# Altium PCB PCB1.PcbDoc
Units mil, origin at the board's own origin, x right, y up, seen from the top; angles counter-clockwise.
Board outline 1455 x 1625 mil, 2 copper layers (Top Layer, Bottom Layer); 37 components, 51 nets, 144 pads, 39 vias.
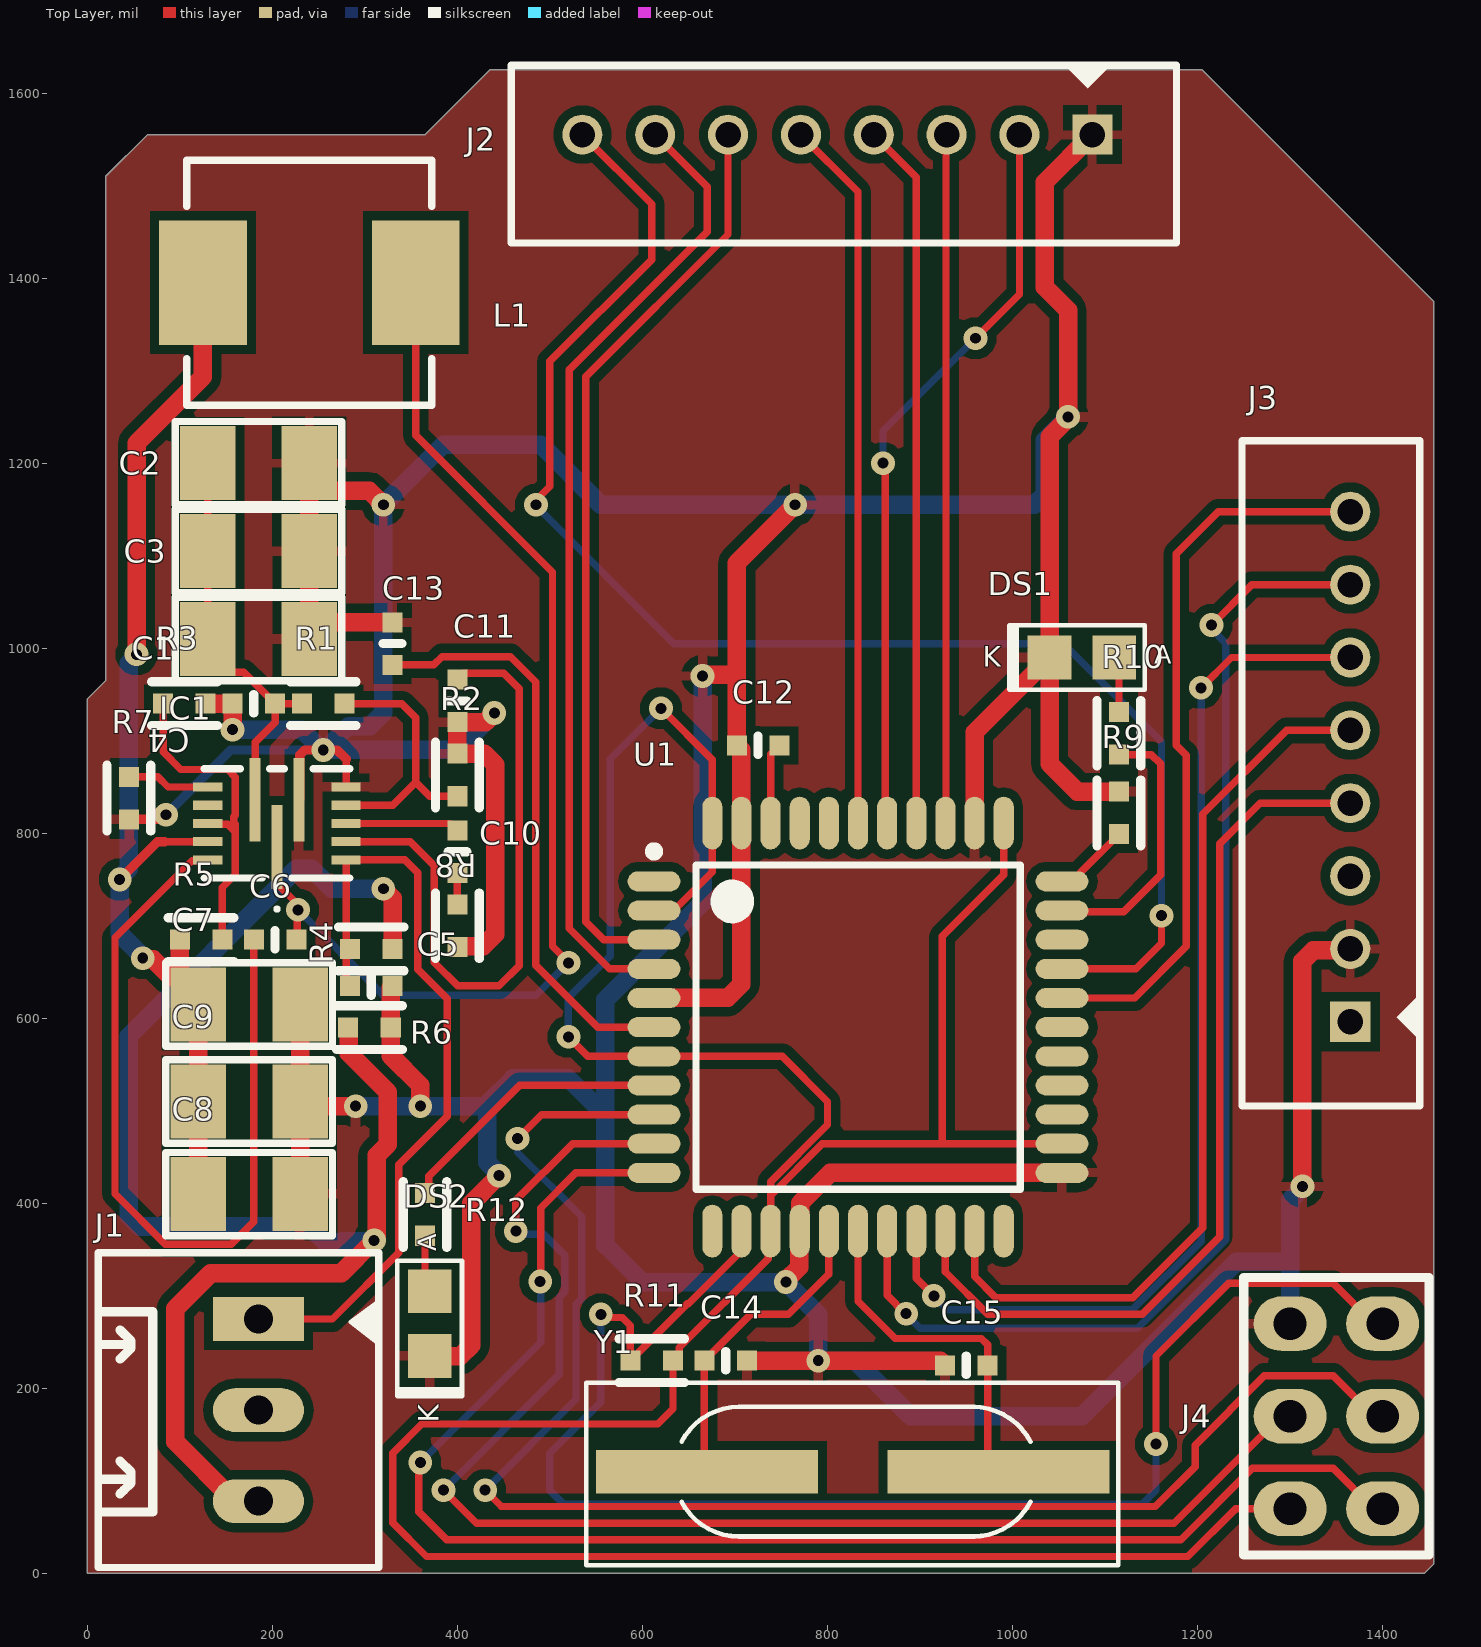
[diagram p0: Top Layer view]
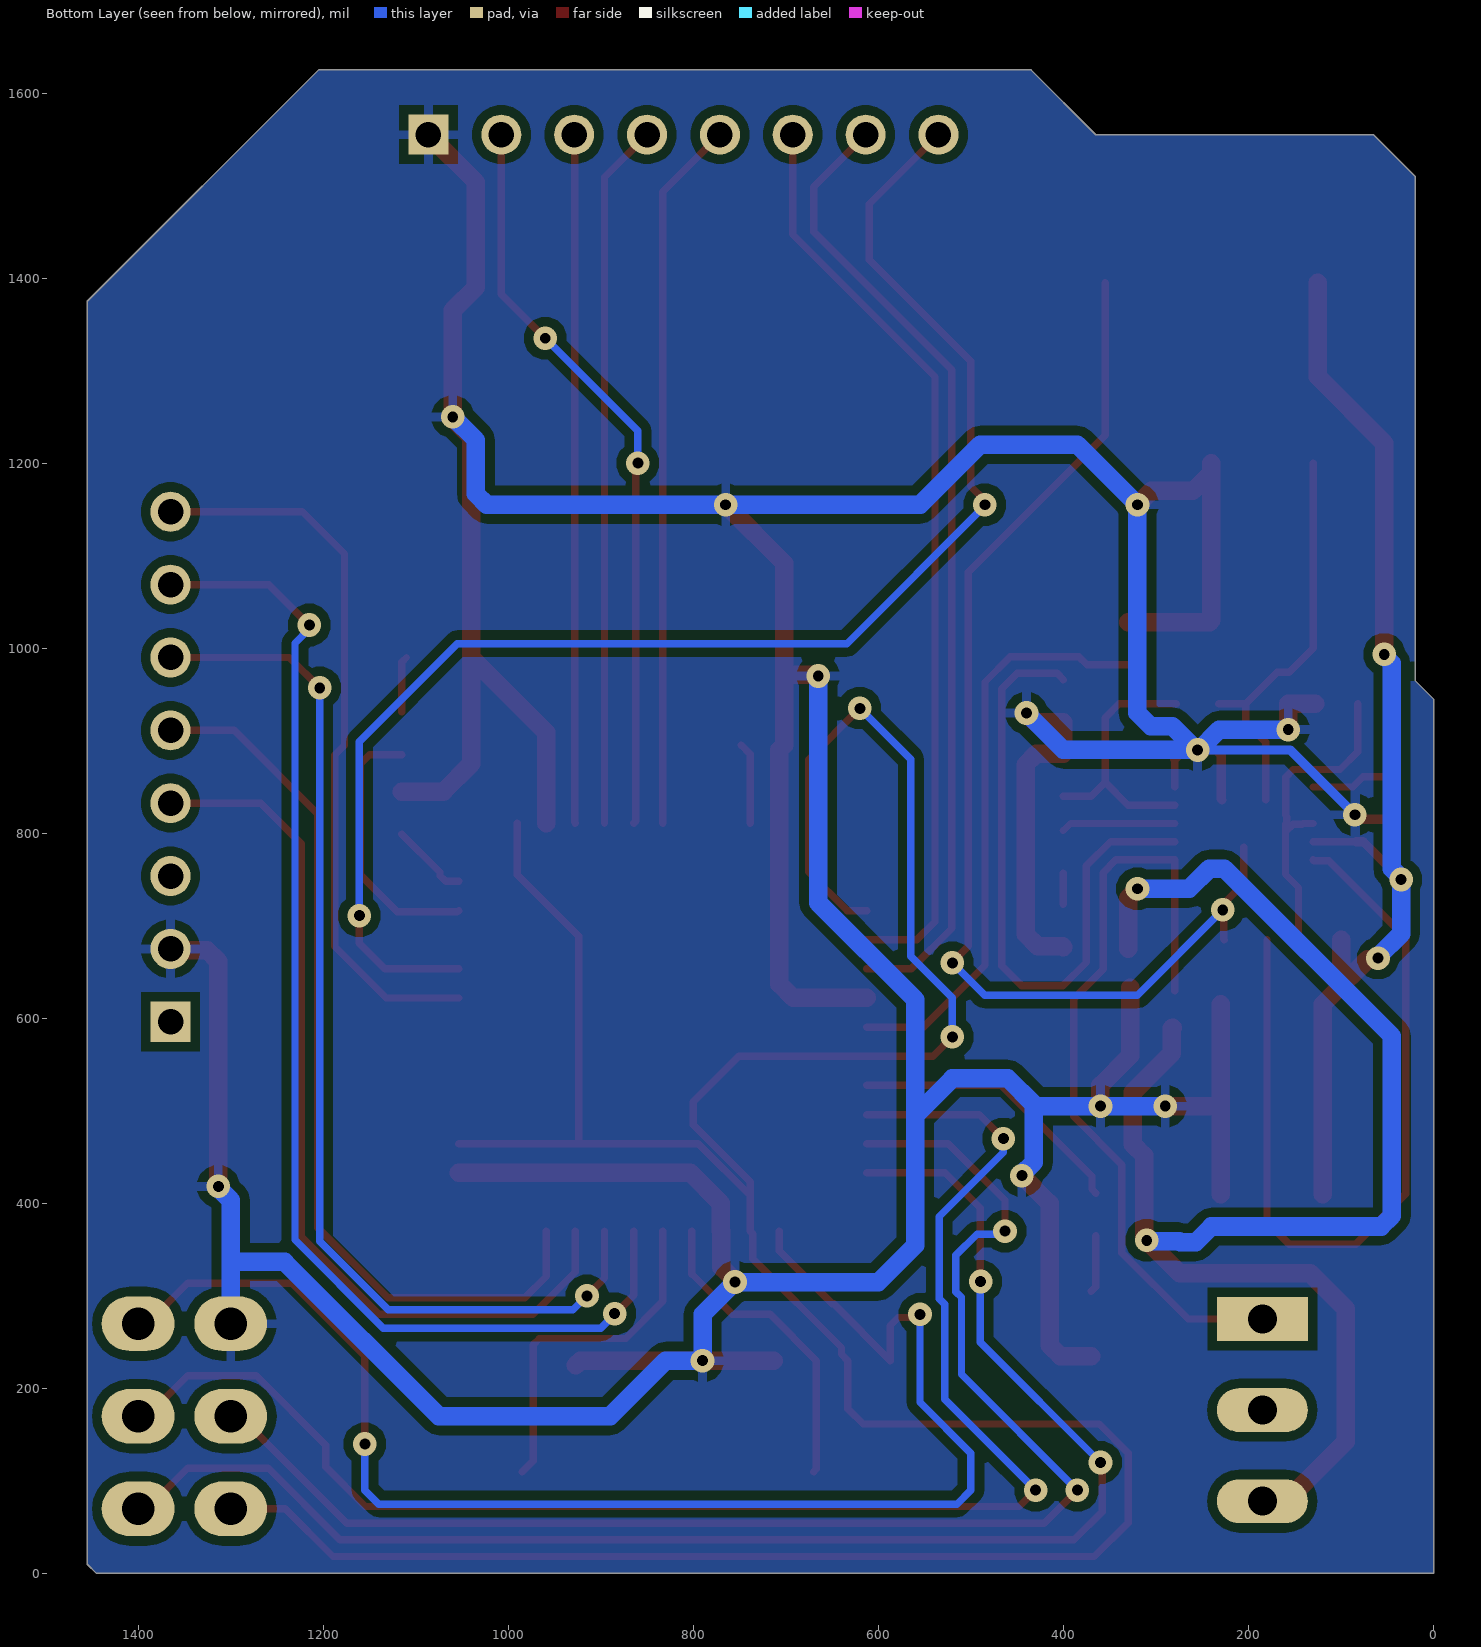
[diagram p1: Bottom Layer view, seen from below]
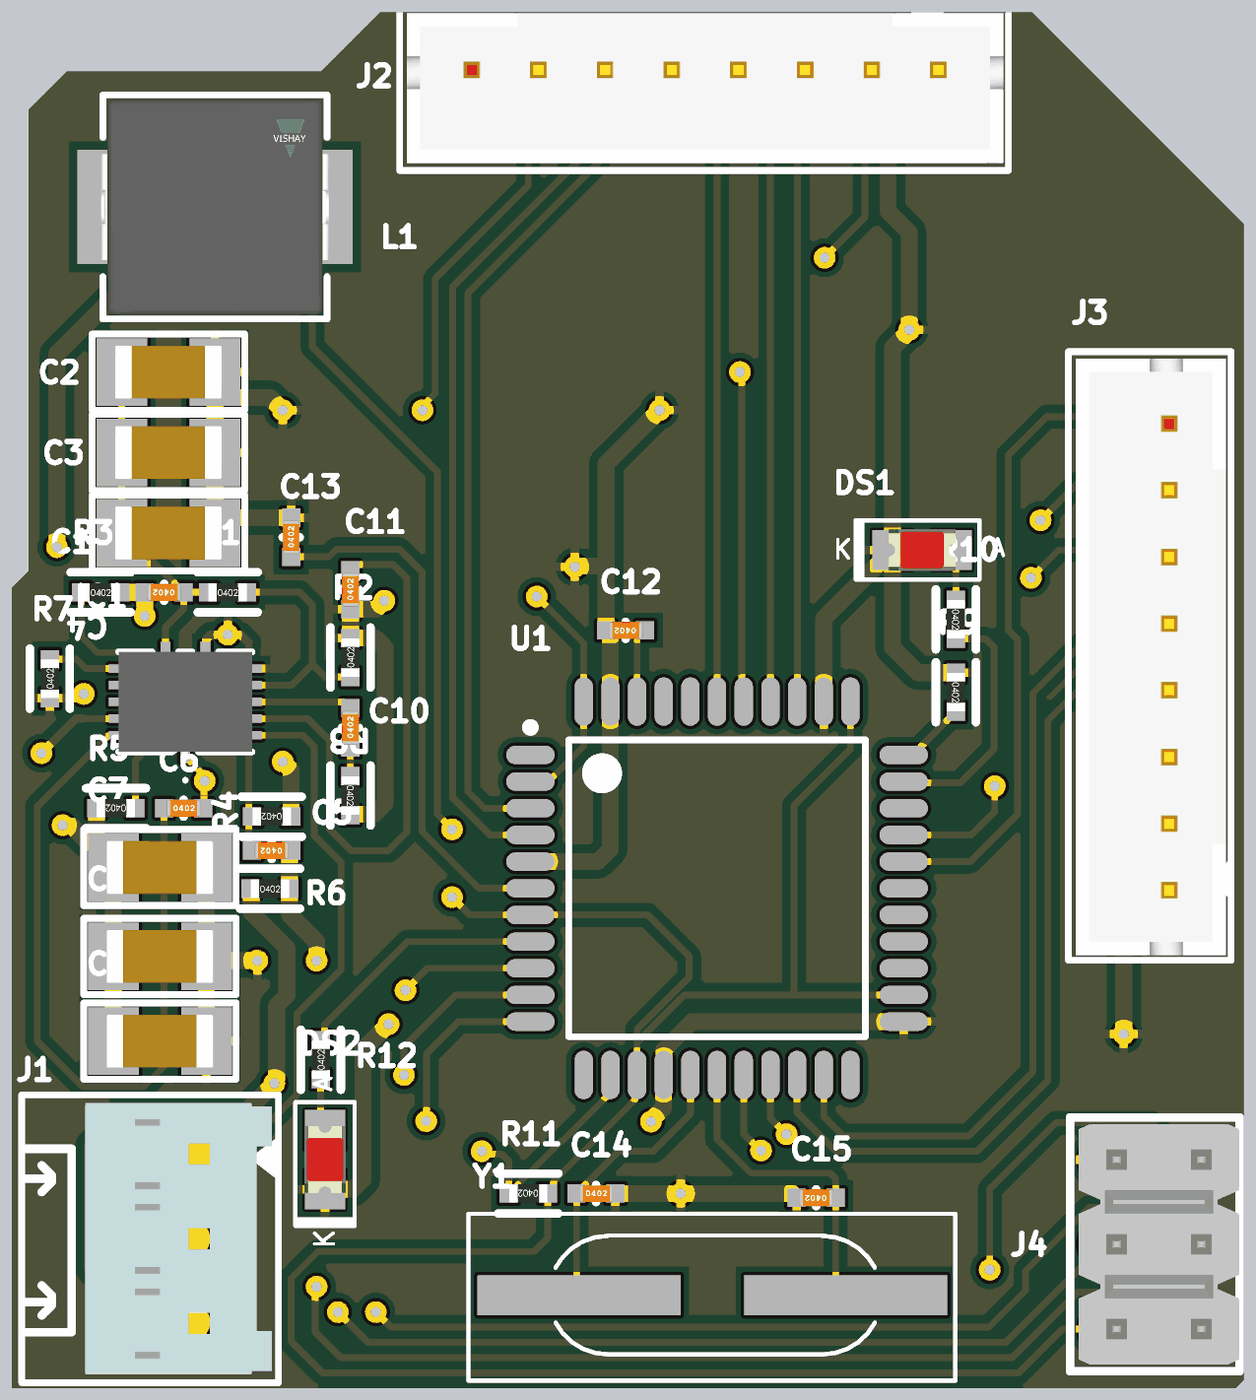
[diagram p2: 3D render of the assembled board from above, using the file's embedded part models]

## Layer stack, top to bottom
Top Solder: solder mask 0.4, Solder Resist, Dk 3.5
Top Layer: signal copper 1.4
Dielectric 1: dielectric 12.6, FR-4, Dk 4.8
Bottom Layer: signal copper 1.4
Bottom Solder: solder mask 0.4, Solder Resist, Dk 3.5

## Board outline
0,0 0,945 20,965 20,1510 65,1555 365,1555 435,1625 1205,1625 1455,1375 1455,10 1445,0

## Design rules (kind name [scope] priority, off if disabled: settings)
Clearance [All] p1: gap=10 ignorepadtopadclearanceinfootprint=TRUE except(0: Arc-Hole Track-Hole SMDPad-Hole THPad-Hole Via-Hole Fill-Hole Poly-Hole Region-Hole Text-Hole)
PolygonConnect [All] p1: connectstyle=Relief reliefconductorwidth=10 reliefentries=4 polygonreliefangle="90 Angle" airgapwidth=10
RoutingVias [All] p1: holewidth=9.84 width=23.62 viastyle="Through Hole" minholewidth=7.87 minwidth=19.68 maxholewidth=11.81 maxwidth=25.59
SolderMaskExpansion [All] p1: expansion=4 istentingtop=FALSE
Width [All] p1: maxlimit=100 minlimit=6 preferedwidth=10 minimp=50.000000 maximp=50.000000 favimp=50.000000
30 further rules are at their usual default settings.

## Classes and differential pairs
component class "BOOST Converter-EV3432-L-00A": C1 C2 C3 C4 C5 C6 C7 C8 C9 C10 C11 IC1 J1 L1 R1 R2 R3 R4 R5 R6 R7 R8
component class "BOOST CONVERTER-EV3432-L-00A - SHEET-2": C12 C13 C14 C15 DS1 DS2 J2 J3 J4 R9 R10 R11 R12 U1 Y1

## Components (designator, comment, footprint, x,y, rotation, side; value= is the part's Value field where it differs from the comment)
C1 "22µF" SMD-1206C 185,1010 r90 top
C2 "22µF" SMD-1206C 185,1200 r90 top
C3 "22µF" SMD-1206C 185,1105 r90 top
C4 "0.10µF" SMD-0402C 180,940 r90 top
C5 "4.7µF" SMD-0402C 307,635 r90 top
C6 "0.10µF" SMD-0402C 203,685 r270 top
C7 "22µF" SMD-1206C 175,615 r90 top
C8 "22µF" SMD-1206C 175,410 r90 top
C9 "22µF" SMD-1206C 175,510 r90 top
C10 "6800pF" SMD-0402C 400,780 r0 top
C11 "0.022µF" SMD-0402C 400,943 r0 top
C12 "0.10µF" SMD-0402C 725,895 r90 top
C13 "1µF" SMD-0402C 330,1005 r0 top
C14 "18pF" SMD-0402C 690,230 r270 top
C15 "18pF" SMD-0402C 950,225 r90 top
DS1 "LED BLUE" LED_0805 1075,990 r0 top
DS2 "RED LED" LED_0805 370,270 r90 top
IC1 "MP3432GL-Z" MP3432GLZ 205,810.59 r90 top
J1 "Terminal Block 2.5mm" CON3_100_TB_TH_ST 185,176.57 r0 top
J2 "B8B-PH-K-S(LF)(SN)" CON8_78_B8B-PH-K-S_TH_ST 1086.22,1555 r180 top
J3 "B8B-PH-K-S(LF)(SN)" CON8_78_B8B-PH-K-S_TH_ST 1365,596.26 r90 top
J4 "3X2 BergStrip" CON6_100_59D78_TH_ST_Duplicate 1400,70 r90 top
L1 "IHLP2525CZER1R5M51" FP-IHLP-2525CZ-FP_2_413x3-MFG 240,1395 r0 top
R1 "750k" SMD-0402-RES 255,940 r270 top
R2 "93.1k" SMD-0402-RES 400,863 r0 top
R3 "0.0" SMD-0402-RES 105,940 r270 top
R4 "130k" SMD-0402-RES 307,675 r90 top
R5 "30k" SMD-0402-RES 123,685 r90 top
R6 "20k" SMD-0402-RES 305,590 r270 top
R7 "27k" SMD-0402-RES 45,838 r0 top
R8 "6.8k" SMD-0402-RES 400,700 r180 top
R9 "10k" SMD-0402-RES 1115,822 r180 top
R10 "3k" SMD-0402-RES 1115,908 r180 top
R11 "10k" SMD-0402-RES 610,230 r90 top
R12 "3k" SMD-0402-RES 365,388 r0 top
U1 "ATmega32U4-AU" 44ML_L 832.99,590.47 r0 top
Y1 "ABLS7M-16.000MHZ-B-2-T" XTAL_314_240X47_SMD 984.96,110 r180 top

## Footprints (in the part's own frame and the unit in brackets; to place one, negate y for a bottom-side part, rotate by r counter-clockwise, add the part's x,y. Pads: shape width x height; smd on the part's side, far side on the other; paste and mask are expansions set on the pad)
44ML_L [mm] "Thin QFP, 44-Leads, Body 10x10mm, Pitch 0.8mm, IPC High Density"
  oval 1.45x0.55 smd: 1(-5.6,4) 2(-5.6,3.2) 3(-5.6,2.4) 4(-5.6,1.6) 5(-5.6,0.8) 6(-5.6,0) 7(-5.6,-0.8) 8(-5.6,-1.6) 9(-5.6,-2.4) 10(-5.6,-3.2) 11(-5.6,-4) 23(5.6,-4) 24(5.6,-3.2) 25(5.6,-2.4) 26(5.6,-1.6) 27(5.6,-0.8) 28(5.6,0) 29(5.6,0.8) 30(5.6,1.6) 31(5.6,2.4) 32(5.6,3.2) 33(5.6,4)
  oval 0.55x1.45 smd: 12(-4,-5.6) 13(-3.2,-5.6) 14(-2.4,-5.6) 15(-1.6,-5.6) 16(-0.8,-5.6) 17(0,-5.6) 18(0.8,-5.6) 19(1.6,-5.6) 20(2.4,-5.6) 21(3.2,-5.6) 22(4,-5.6) 34(4,5.6) 35(3.2,5.6) 36(2.4,5.6) 37(1.6,5.6) 38(0.8,5.6) 39(0,5.6) 40(-0.8,5.6) 41(-1.6,5.6) 42(-2.4,5.6) 43(-3.2,5.6) 44(-4,5.6)
  silkscreen extent -5.72,-4.45 4.45,4.95, body extent -5,-5 5,5, height 1.2
CON3_100_TB_TH_ST [mm]
  rect 2.5x1.2 hole 0.8: 1(0,2.5)
  oval 2.5x1.2 hole 0.8: 2(0,0) 3(0,-2.5)
  silkscreen extent -4.4,-4.32 3.3,4.32, body extent -2.5,-4.07 3.1,4.07, height 12.86
CON6_100_59D78_TH_ST_Duplicate [mm] "Berg strip"
  oval 1.5x2 hole 0.9: 1(0,0) 2(0,2.54) 3(2.54,0) 4(2.54,2.54) 5(5.08,0) 6(5.08,2.54)
  silkscreen extent -1.27,-1.27 6.35,3.81, body extent -1.07,-1.27 6.15,3.56, height 8.18
CON8_78_B8B-PH-K-S_TH_ST [mm] "Connector Header"
  rect 1.1x1.1 hole 0.7: 1(0,0)
  round 1.1 hole 0.7: 2(2,0) 3(4,0) 4(6,0) 5(8,0) 6(10,0) 7(12,0) 8(14,0)
  silkscreen extent -2.31,-1.91 15.95,2.97, body extent -2.16,-1.75 15.74,2.75, height 6.01
FP-IHLP-2525CZ-FP_2_413x3-MFG [mil]
  rect 95x135 smd paste+0 mask+0: 1(-115,0) 2(115,0)
  silkscreen extent -132,-132 132,132, body extent -166,-136 166,136, height 10
LED_0805 [mm] "LED"
  rect 1.2x1.2 smd mask+0.076: A(0.889,0) K(-0.889,0)
  silkscreen extent -1.99,-0.89 1.73,0.89, body extent -1.01,-0.62 1.01,0.63, height 1.1
MP3432GLZ [mm]
  rect 2.3x0.3 smd: 1(-0.65,0) 7(0.65,-0.6) 8(0.65,0.6)
  rect 0.25x0.8 smd: 2(-1,-1.9) 3(-0.5,-1.9) 4(0,-1.9) 5(0.5,-1.9) 6(1,-1.9) 9(1,1.9) 10(0.5,1.9) 11(0,1.9) 12(-0.5,1.9) 13(-1,1.9)
  silkscreen extent -2.4,-2 1.5,2, body extent -1.5,-2 1.5,2, height 1.1
SMD-0402-RES [mm]
  rect 0.55x0.55 smd: 1(0,0.584) 2(0,-0.584)
  silkscreen extent -0.6,-0.9 0.6,0.9, body extent -0.28,-0.57 0.27,0.58, height 0.41
SMD-0402C [mm]
  rect 0.55x0.55 smd: 1(0,0.584) 2(0,-0.584)
  silkscreen extent -0.25,0 0.25,0, body extent -0.25,-0.51 0.25,0.51, height 0.51
SMD-1206C [mil]
  rect 80x60 smd: 1(0,55) 2(0,-55)
  silkscreen extent -45,-90 45,90, body extent -31,-63 32,63, height 39
XTAL_314_240X47_SMD [mm] "CASE: TH"
  rect 6.096x1.2 smd: 1(0,0) 2(8,0)
  silkscreen extent -3.29,-2.44 11.32,2.57, body extent -2.99,-2.27 10.9,2.41, height 3.05

## Part data
C1 C2 C3 C7 C8 C9: library part GRT31CR61E226ME01L, "CAP CER 22UF 25V X5R 1206", Digi-Key Part Number=490-12451-1-ND, Manufacturer="Murata Electronics North America", Operating Temperature="-55°C ~ 85°C", Package / Case="1206 (3216 Metric)", Ratings=AEC-Q200, Temperature Coefficient=X5R, Tolerance=±20%, Voltage=25V, @ qty=0, Applications=Automotive, Datasheets=http://search.murata.co.jp/Ceramy/image/img/A01X/G101/ENG/GRT31CR61E226ME01-01.pdf, Factory Stock=0, Features=-, Height - Seated (Max)=-, Image=//media.digikey.com/Renders/Murata%20Renders/GR331BD72E473KW01L.jpg, Lead Spacing=-, Lead Style=-, Minimum Quantity=1, Mounting Type="Surface Mount, MLCC", Packaging="Cut Tape (CT)", Part Number=GRT31CR61E226ME01L, Part Status=Active, Quantity Available=4719, Series=GRT, Size / Dimension="0.126\" L x 0.063\" W (3.20mm x 1.60mm)", Thickness (Max)="0.071\" (1.80mm)", Unit Price (USD)=0.52
C4 C6: library part GRM155R61E104KA87D, "CAP CER 0.1UF 25V X5R 0402", Digi-Key Part Number=490-5920-1-ND, Manufacturer="Murata Electronics North America", Operating Temperature="-55°C ~ 85°C", Package / Case="0402 (1005 Metric)", Ratings=-, Temperature Coefficient=X5R, Tolerance=±10%, Voltage=25V, @ qty=0, Applications="General Purpose", Datasheets=http://www.murata.com/~/media/webrenewal/support/library/catalog/products/capacitor/mlcc/c02e.pdf, Factory Stock=0, Features=-, Height - Seated (Max)=-, Image=//media.digikey.com/Renders/Murata%20Renders/ZRB-SERIES-0402.jpg, Lead Spacing=-, Lead Style=-, Minimum Quantity=1, Mounting Type="Surface Mount, MLCC", Packaging="Cut Tape (CT)", Part Number=GRM155R61E104KA87D, Part Status=Active, Quantity Available=2653187, Series=GRM, Size / Dimension="0.039\" L x 0.020\" W (1.00mm x 0.50mm)", Thickness (Max)="0.022\" (0.55mm)", Unit Price (USD)=0.1
C5: library part GRM153R60J475ME15D, "CAP CER 4.7UF 6.3V X5R 0402", Digi-Key Part Number=490-13232-1-ND, Manufacturer="Murata Electronics North America", Operating Temperature="-55°C ~ 85°C", Package / Case="0402 (1005 Metric)", Ratings=-, Temperature Coefficient=X5R, Tolerance=±20%, Voltage=6.3V, @ qty=0, Applications="General Purpose", Datasheets=http://psearch.en.murata.com/capacitor/product/GRM153R60J475ME15%23.pdf, Factory Stock=0, Features="Derating Recommended", Height - Seated (Max)=-, Image=//media.digikey.com/Renders/Murata%20Renders/ZRB-SERIES-0402.jpg, Lead Spacing=-, Lead Style=-, Minimum Quantity=1, Mounting Type="Surface Mount, MLCC", Packaging="Cut Tape (CT)", Part Number=GRM153R60J475ME15D, Part Status=Active, Quantity Available=30412, Series=GRM, Size / Dimension="0.039\" L x 0.020\" W (1.00mm x 0.50mm)", Thickness (Max)="0.013\" (0.33mm)", Unit Price (USD)=0.27
C10: library part GCM155R71H682KA55D, "CAP CER 6800PF 50V X7R 0402", Digi-Key Part Number=490-11152-1-ND, Manufacturer="Murata Electronics North America", Operating Temperature="-55°C ~ 125°C", Package / Case="0402 (1005 Metric)", Ratings=AEC-Q200, Temperature Coefficient=X7R, Tolerance=±10%, Voltage=50V, @ qty=0, Applications=Automotive, Datasheets=http://www.murata.com/~/media/webrenewal/support/library/catalog/products/capacitor/mlcc/c03e.ashx, Factory Stock=0, Features=-, Height - Seated (Max)=-, Image=//media.digikey.com/Renders/Murata%20Renders/ZRB-SERIES-0402.jpg, Lead Spacing=-, Lead Style=-, Minimum Quantity=1, Mounting Type="Surface Mount, MLCC", Packaging="Cut Tape (CT)", Part Number=GCM155R71H682KA55D, Part Status=Active, Quantity Available=13886, Series=GCM, Size / Dimension="0.039\" L x 0.020\" W (1.00mm x 0.50mm)", Thickness (Max)="0.022\" (0.55mm)", Unit Price (USD)=0.1
C11: library part GRM155R61C223KA01D, "CAP CER 0.022UF 16V X5R 0402", Digi-Key Part Number=490-6312-1-ND, Manufacturer="Murata Electronics North America", Operating Temperature="-55°C ~ 85°C", Package / Case="0402 (1005 Metric)", Ratings=-, Temperature Coefficient=X5R, Tolerance=±10%, Voltage=16V, @ qty=0, Applications="General Purpose", Datasheets=http://www.murata.com/~/media/webrenewal/support/library/catalog/products/capacitor/mlcc/c02e.pdf, Factory Stock=0, Features=-, Height - Seated (Max)=-, Image=//media.digikey.com/Renders/Murata%20Renders/ZRB-SERIES-0402.jpg, Lead Spacing=-, Minimum Quantity=1, Mounting Type="Surface Mount, MLCC", Packaging="Cut Tape (CT)", Part Number=GRM155R61C223KA01D, Part Status=Active, Quantity Available=94602, Series=GRM, Size / Dimension="0.039\" L x 0.020\" W (1.00mm x 0.50mm)", Thickness (Max)="0.022\" (0.55mm)", Unit Price (USD)=0.1
C12: library part GCM155R71C104KA55D, "CAP CER 0.1UF 16V X7R 0402", Digi-Key Part Number=490-4759-1-ND, Manufacturer="Murata Electronics North America", Operating Temperature="-55°C ~ 125°C", Package / Case="0402 (1005 Metric)", Ratings=AEC-Q200, Temperature Coefficient=X7R, Tolerance=±10%, Voltage=16V, @ qty=0, Applications=Automotive, Datasheets=http://www.murata.com/~/media/webrenewal/support/library/catalog/products/capacitor/mlcc/c03e.ashx, Factory Stock=0, Features=-, Height - Seated (Max)=-, Image=//media.digikey.com/Renders/Murata%20Renders/ZRB-SERIES-0402.jpg, Lead Spacing=-, Lead Style=-, Minimum Quantity=1, Mounting Type="Surface Mount, MLCC", Packaging="Cut Tape (CT)", Part Number=GCM155R71C104KA55D, Part Status=Active, Quantity Available=734194, Series=GCM, Size / Dimension="0.039\" L x 0.020\" W (1.00mm x 0.50mm)", Thickness (Max)="0.022\" (0.55mm)", Unit Price (USD)=0.1
C13: library part GRM155C81C105KE11D, "CAP CER 1UF 16V X6S 0402", Digi-Key Part Number=490-12700-1-ND, Manufacturer="Murata Electronics North America", Operating Temperature="-55°C ~ 105°C", Package / Case="0402 (1005 Metric)", Ratings=-, Temperature Coefficient=X6S, Tolerance=±10%, Voltage=16V, @ qty=0, Applications="General Purpose", Datasheets=http://www.murata.com/~/media/webrenewal/support/library/catalog/products/capacitor/mlcc/c02e.pdf, Factory Stock=0, Features=-, Height - Seated (Max)=-, Image=//media.digikey.com/Renders/Murata%20Renders/ZRB-SERIES-0402.jpg, Lead Spacing=-, Lead Style=-, Minimum Quantity=1, Mounting Type="Surface Mount, MLCC", Packaging="Cut Tape (CT)", Part Number=GRM155C81C105KE11D, Part Status=Active, Quantity Available=37242, Series=GRM, Size / Dimension="0.039\" L x 0.020\" W (1.00mm x 0.50mm)", Thickness (Max)="0.024\" (0.60mm)", Unit Price (USD)=0.29
C14 C15: library part GRM1555C1E180JA01D, "CAP CER 18PF 25V NP0 0402", Digi-Key Part Number=490-6172-1-ND, Manufacturer="Murata Electronics North America", Operating Temperature="-55°C ~ 125°C", Package / Case="0402 (1005 Metric)", Ratings=-, Temperature Coefficient="C0G, NP0", Tolerance=±5%, Voltage=25V, @ qty=0, Applications="General Purpose", Datasheets=http://www.murata.com/~/media/webrenewal/support/library/catalog/products/capacitor/mlcc/c02e.pdf, Factory Stock=0, Features=-, Height - Seated (Max)=-, Image=//media.digikey.com/Renders/Murata%20Renders/ZRB-SERIES-0402.jpg, Lead Spacing=-, Lead Style=-, Minimum Quantity=1, Mounting Type="Surface Mount, MLCC", Packaging="Cut Tape (CT)", Part Number=GRM1555C1E180JA01D, Part Status=Active, Quantity Available=78161, Series=GRM, Size / Dimension="0.039\" L x 0.020\" W (1.00mm x 0.50mm)", Thickness (Max)="0.022\" (0.55mm)", Unit Price (USD)=0.1
DS1: library part LED_BLUE-3V3-20mA-0805, "Blue 470nm LED Indication - Discrete 3.3V 0805 (2012 Metric)", Alternate Part Number-1=NA, Case/Package=0805, Manufacturer="Vishay Lite-On", Manufacturer Part Number=LTST-C171TBKT, Supplier Part Number-1=LTST-C171TBKT, Supplier-1="SP ROAD"
DS2: library part LED_RED-2V-20mA-0805, "Red 631nm LED Indication - Discrete 2V 0805 (2012 Metric)", Alternate Part Number-1=NA, Case/Package=0805, Manufacturer="Vishay Lite-On", Manufacturer Part Number=LTST-C171KRKT, Supplier Part Number-1=LTST-C171KRKT, Supplier-1="SP ROAD"
IC1: "Integrated Circuit", Manufacturer_Name="Monolithic Power Systems (MPS)", Mouser Part Number=946-MP3432GL-Z, Height=1mm, Manufacturer_Part_Number=MP3432GL-Z, Mouser Price/Stock=https://www.mouser.co.uk/ProductDetail/Monolithic-Power-Systems-MPS/MP3432GL-Z?qs=rkhjVJ6%2F3EKdOTMiti3nIQ%3D%3D
J1: library part CON-TB_3X1-100-ST-TH, "3 Pins, 1 Row 2.54mm Pitch, straight Connector, male", Alternate Part Number-1=NA, Case/Package=TH-CON, Manufacturer="Phoenix Contact", Manufacturer Part Number=1725669, Supplier Part Number-1=1725669, Supplier-1="SP ROAD"
J2 J3: library part CON-PLG_8X1-78-ST-TH, "8 Pins, 1 Row 2mm Pitch, straight Connector, male", Alternate Part Number-1=NA, Case/Package=TH-CON, Manufacturer=JST, Mating Part Number=PHR-8, Supplier Part Number-1=C157975, Manufacturer Part Number=B8B-PH-K-S(LF)(SN), Supplier-1=LCSC
J4: library part CON-BS-PLG_3X2-100-ST-TH, "6 Pins, 2 Row 2.54mm Pitch, Straight bergstrip, Male", Alternate Part Number-1=NA, Case/Package=TH, Manufacturer=NA, Manufacturer Part Number=NA, Supplier Part Number-1=NA, Supplier-1="SP ROAD"
L1: library part CMP-02424-000221-1, "Commercial Inductors, High Temperature (155 °C) Series 1.5uH 10.6A 13.2mΩ 20%"
R1: library part ERJ-2RKF7503X, "RES SMD 750K OHM 1% 1/10W 0402", Digi-Key Part Number=P750KLCT-ND, Manufacturer="Panasonic Electronic Components", Operating Temperature="-55°C ~ 155°C", Package / Case="0402 (1005 Metric)", Power (Watts)="0.1W, 1/10W", Supplier Device Package=0402, Temperature Coefficient=±100ppm/°C, Tolerance=±1%, @ qty=1500, Composition="Thick Film", Datasheets=http://industrial.panasonic.com/www-cgi/jvcr13pz.cgi?E+PZ+3+AOA0002+ERJ2RKF7503X+7+WW, Factory Stock=0, Failure Rate=-, Features="Automotive AEC-Q200", Height - Seated (Max)="0.016\" (0.40mm)", Image=//media.digikey.com/Photos/Panasonic%20Photos/ERJ-PA2-Series.jpg, Minimum Quantity=1, Number of Terminations=2, Packaging="Cut Tape (CT)", Part Number=ERJ-2RKF7503X, Part Status=Active, Quantity Available=78807, Series=ERJ, Size / Dimension="0.039\" L x 0.020\" W (1.00mm x 0.50mm)", Unit Price (USD)=0.00496
R2: library part ERJ-2RKF9312X, "RES SMD 93.1K OHM 1% 1/10W 0402", Digi-Key Part Number=P93.1KLCT-ND, Manufacturer="Panasonic Electronic Components", Operating Temperature="-55°C ~ 155°C", Package / Case="0402 (1005 Metric)", Power (Watts)="0.1W, 1/10W", Supplier Device Package=0402, Temperature Coefficient=±100ppm/°C, Tolerance=±1%, @ qty=1500, Composition="Thick Film", Datasheets=http://industrial.panasonic.com/www-cgi/jvcr13pz.cgi?E+PZ+3+AOA0002+ERJ2RKF9312X+7+WW, Factory Stock=0, Failure Rate=-, Features="Automotive AEC-Q200", Height - Seated (Max)="0.016\" (0.40mm)", Image=//media.digikey.com/Photos/Panasonic%20Photos/ERJ-PA2-Series.jpg, Minimum Quantity=1, Number of Terminations=2, Packaging="Cut Tape (CT)", Part Number=ERJ-2RKF9312X, Part Status=Active, Quantity Available=130315, Series=ERJ, Size / Dimension="0.039\" L x 0.020\" W (1.00mm x 0.50mm)", Unit Price (USD)=0.00496
R3: library part ERJ-2GE0R00X, "RES SMD 0.0OHM JUMPER 1/10W 0402", Digi-Key Part Number=P0.0JCT-ND, Manufacturer="Panasonic Electronic Components", Operating Temperature="-55°C ~ 155°C", Package / Case="0402 (1005 Metric)", Power (Watts)="0.1W, 1/10W", Supplier Device Package=0402, Temperature Coefficient=-, Tolerance=Jumper, @ qty=1500, Composition="Thick Film", Datasheets=http://industrial.panasonic.com/www-cgi/jvcr13pz.cgi?E+PZ+3+AOA0001+ERJ2GE0R00X+7+WW, Factory Stock=0, Failure Rate=-, Features="Automotive AEC-Q200", Height - Seated (Max)="0.016\" (0.40mm)", Image=//media.digikey.com/Photos/Panasonic%20Photos/ERJ-PA2-Series.jpg, Minimum Quantity=1, Number of Terminations=2, Packaging="Cut Tape (CT)", Part Number=ERJ-2GE0R00X, Part Status=Active, Quantity Available=3152483, Series=ERJ, Size / Dimension="0.039\" L x 0.020\" W (1.00mm x 0.50mm)", Unit Price (USD)=0.00384
R4: library part ERJ-2RKF1303X, "RES SMD 130K OHM 1% 1/10W 0402", Digi-Key Part Number=P130KLCT-ND, Manufacturer="Panasonic Electronic Components", Operating Temperature="-55°C ~ 155°C", Package / Case="0402 (1005 Metric)", Power (Watts)="0.1W, 1/10W", Supplier Device Package=0402, Temperature Coefficient=±100ppm/°C, Tolerance=±1%, @ qty=1500, Composition="Thick Film", Datasheets=http://industrial.panasonic.com/www-cgi/jvcr13pz.cgi?E+PZ+3+AOA0002+ERJ2RKF1303X+7+WW, Factory Stock=0, Failure Rate=-, Features="Automotive AEC-Q200", Height - Seated (Max)="0.016\" (0.40mm)", Image=//media.digikey.com/Photos/Panasonic%20Photos/ERJ-PA2-Series.jpg, Minimum Quantity=1, Number of Terminations=2, Packaging="Cut Tape (CT)", Part Number=ERJ-2RKF1303X, Part Status=Active, Quantity Available=69838, Series=ERJ, Size / Dimension="0.039\" L x 0.020\" W (1.00mm x 0.50mm)", Unit Price (USD)=0.00496
R5: library part ERJ-2RKF3002X, "RES SMD 30K OHM 1% 1/10W 0402", Digi-Key Part Number=P30.0KLCT-ND, Manufacturer="Panasonic Electronic Components", Operating Temperature="-55°C ~ 155°C", Package / Case="0402 (1005 Metric)", Power (Watts)="0.1W, 1/10W", Supplier Device Package=0402, Temperature Coefficient=±100ppm/°C, Tolerance=±1%, @ qty=1500, Composition="Thick Film", Datasheets=http://industrial.panasonic.com/www-cgi/jvcr13pz.cgi?E+PZ+3+AOA0002+ERJ2RKF3002X+7+WW, Factory Stock=0, Failure Rate=-, Features="Automotive AEC-Q200", Height - Seated (Max)="0.016\" (0.40mm)", Image=//media.digikey.com/Photos/Panasonic%20Photos/ERJ-PA2-Series.jpg, Minimum Quantity=1, Number of Terminations=2, Packaging="Cut Tape (CT)", Part Number=ERJ-2RKF3002X, Part Status=Active, Quantity Available=144382, Series=ERJ, Size / Dimension="0.039\" L x 0.020\" W (1.00mm x 0.50mm)", Unit Price (USD)=0.00496
R6: library part ERJ-2RKF2002X, "RES SMD 20K OHM 1% 1/10W 0402", Digi-Key Part Number=P20.0KLCT-ND, Manufacturer="Panasonic Electronic Components", Operating Temperature="-55°C ~ 155°C", Package / Case="0402 (1005 Metric)", Power (Watts)="0.1W, 1/10W", Supplier Device Package=0402, Temperature Coefficient=±100ppm/°C, Tolerance=±1%, @ qty=1500, Composition="Thick Film", Datasheets=http://industrial.panasonic.com/www-cgi/jvcr13pz.cgi?E+PZ+3+AOA0002+ERJ2RKF2002X+7+WW, Factory Stock=0, Failure Rate=-, Features="Automotive AEC-Q200", Height - Seated (Max)="0.016\" (0.40mm)", Image=//media.digikey.com/Photos/Panasonic%20Photos/ERJ-PA2-Series.jpg, Minimum Quantity=1, Number of Terminations=2, Packaging="Cut Tape (CT)", Part Number=ERJ-2RKF2002X, Part Status=Active, Quantity Available=1690955, Series=ERJ, Size / Dimension="0.039\" L x 0.020\" W (1.00mm x 0.50mm)", Unit Price (USD)=0.00496
R7: library part ERJ-2RKF2702X, "RES SMD 27K OHM 1% 1/10W 0402", Digi-Key Part Number=P27.0KLCT-ND, Manufacturer="Panasonic Electronic Components", Operating Temperature="-55°C ~ 155°C", Package / Case="0402 (1005 Metric)", Power (Watts)="0.1W, 1/10W", Supplier Device Package=0402, Temperature Coefficient=±100ppm/°C, Tolerance=±1%, @ qty=1500, Composition="Thick Film", Datasheets=http://industrial.panasonic.com/www-cgi/jvcr13pz.cgi?E+PZ+3+AOA0002+ERJ2RKF2702X+7+WW, Factory Stock=0, Failure Rate=-, Features="Automotive AEC-Q200", Height - Seated (Max)="0.016\" (0.40mm)", Image=//media.digikey.com/Photos/Panasonic%20Photos/ERJ-PA2-Series.jpg, Minimum Quantity=1, Number of Terminations=2, Packaging="Cut Tape (CT)", Part Number=ERJ-2RKF2702X, Part Status=Active, Quantity Available=113507, Series=ERJ, Size / Dimension="0.039\" L x 0.020\" W (1.00mm x 0.50mm)", Unit Price (USD)=0.00496
R8: library part ERJ-2RKF6801X, "RES SMD 6.8K OHM 1% 1/10W 0402", Digi-Key Part Number=P6.80KLCT-ND, Manufacturer="Panasonic Electronic Components", Operating Temperature="-55°C ~ 155°C", Package / Case="0402 (1005 Metric)", Power (Watts)="0.1W, 1/10W", Supplier Device Package=0402, Temperature Coefficient=±100ppm/°C, Tolerance=±1%, @ qty=1500, Composition="Thick Film", Datasheets=http://industrial.panasonic.com/www-cgi/jvcr13pz.cgi?E+PZ+3+AOA0002+ERJ2RKF6801X+7+WW, Factory Stock=0, Failure Rate=-, Features="Automotive AEC-Q200", Height - Seated (Max)="0.016\" (0.40mm)", Image=//media.digikey.com/Photos/Panasonic%20Photos/ERJ-PA2-Series.jpg, Minimum Quantity=1, Number of Terminations=2, Packaging="Cut Tape (CT)", Part Number=ERJ-2RKF6801X, Part Status=Active, Quantity Available=52531, Series=ERJ, Size / Dimension="0.039\" L x 0.020\" W (1.00mm x 0.50mm)", Unit Price (USD)=0.00496
R9 R11: library part ERJ-2RKF1002X, "RES SMD 10K OHM 1% 1/10W 0402", Digi-Key Part Number=P10.0KLCT-ND, Manufacturer="Panasonic Electronic Components", Operating Temperature="-55°C ~ 155°C", Package / Case="0402 (1005 Metric)", Power (Watts)="0.1W, 1/10W", Supplier Device Package=0402, Temperature Coefficient=±100ppm/°C, Tolerance=±1%, @ qty=1500, Composition="Thick Film", Datasheets=http://industrial.panasonic.com/www-cgi/jvcr13pz.cgi?E+PZ+3+AOA0002+ERJ2RKF1002X+7+WW, Factory Stock=0, Failure Rate=-, Features="Automotive AEC-Q200", Height - Seated (Max)="0.016\" (0.40mm)", Image=//media.digikey.com/Photos/Panasonic%20Photos/ERJ-PA2-Series.jpg, Minimum Quantity=1, Number of Terminations=2, Packaging="Cut Tape (CT)", Part Number=ERJ-2RKF1002X, Part Status=Active, Quantity Available=9922786, Series=ERJ, Size / Dimension="0.039\" L x 0.020\" W (1.00mm x 0.50mm)", Unit Price (USD)=0.00496
R10 R12: library part ERJ-2RKF3001X, "RES SMD 3K OHM 1% 1/10W 0402", Digi-Key Part Number=P3.00KLCT-ND, Manufacturer="Panasonic Electronic Components", Operating Temperature="-55°C ~ 155°C", Package / Case="0402 (1005 Metric)", Power (Watts)="0.1W, 1/10W", Supplier Device Package=0402, Temperature Coefficient=±100ppm/°C, Tolerance=±1%, @ qty=1500, Composition="Thick Film", Datasheets=http://industrial.panasonic.com/www-cgi/jvcr13pz.cgi?E+PZ+3+AOA0002+ERJ2RKF3001X+7+WW, Factory Stock=0, Failure Rate=-, Features="Automotive AEC-Q200", Height - Seated (Max)="0.016\" (0.40mm)", Image=//media.digikey.com/Photos/Panasonic%20Photos/ERJ-PA2-Series.jpg, Minimum Quantity=1, Number of Terminations=2, Packaging="Cut Tape (CT)", Part Number=ERJ-2RKF3001X, Part Status=Active, Quantity Available=125566, Series=ERJ, Size / Dimension="0.039\" L x 0.020\" W (1.00mm x 0.50mm)", Unit Price (USD)=0.00496
U1: library part CMP-0095-00285-2, "8-bit AVR Microcontroller, 2.7-5.5V, 16MHz, 32KB Flash, 1KB EEPROM, 2.5KB SRAM, USB Controller, 44-pin TQFP, Industrial Grade (-40°C to 85°C), Ext Osc", ComponentLink1Description="Manufacturer URL", ComponentLink1URL=http://www.atmel.com/, ComponentLink2Description="ATmega16U4/32U4 Datasheet", ComponentLink2URL=http://www.atmel.com/dyn/resources/prod_documents/doc7766.pdf, ComponentLink3Description="ATmega16U4 ATmega32U4 Summary", ComponentLink3URL=http://www.atmel.com/dyn/resources/prod_documents/7766S.pdf, DatasheetVersion="revF, Nov-2010", PackageDescription="44-Pin Plastic Thin Quad Flat Pack, 10 x 10 x 1.0 mm Body, 0.8 mm Pitch (TQFP)", PackageReference=44ML, PackageVersion="rev.G, Jul-2007", RevisionNote="DatasheetVersion updated. URLs added."
Y1: library part XTAL_16MHz-ABLS7M-16.000MHZ-B-2-T, "16MHz ±20ppm Crystal 18pF 60 Ohms 2-SMD, Flat Lead", Alternate Part Number-1=NA, Case/Package=SMD, Manufacturer=Abracon, Manufacturer Part Number=ABLS7M-16.000MHZ-B-2-T, Supplier Part Number-1=ABLS7M-16.000MHZ-B-2-T, Supplier-1=ARROW

## Via types
v1: diameter 25.59, hole 11.81, Top Layer to Bottom Layer, 39 vias

## Nets (pads, with @x,y where several pads share a name; then routed paths per layer and width w, separated by ;. In a path a pad name is that pad's centre, name@x,y a point inside that pad or via, vN(x,y) a via of type N, cw(c..) or ccw(c..) an arc to the next point about the centre after c; other vN are vias at no path point)
A0: J2.3 U1.36 | length 744.6
  Top Layer w8: U1.36 928.11,811.57 928.11,1554.37 J2.3
A1: J2.4 U1.37 | length 763.1
  Top Layer w8: J2.4 895.98,1509.02 U1.37
A2: J2.2 U1.38 | length 807
  Top Layer w8: v1(860,1200) 862.24,1197.76 862.24,813.19 U1.38 ; v1(960,1335) 1007.48,1382.48 J2.2
  Bottom Layer w8: v1(860,1200) 860,1235 v1(960,1335)
A3: J2.5 U1.39 | length 769.6
  Top Layer w8: J2.5 832.99,1493.27 U1.39
A4: U1.40
A5: U1.41
COMF: C10.1 IC1.4 | length 123.3
  Top Layer w8: IC1.4 392.41,810.59 C10.1
D0/RX: J3.4 U1.20 | length 978.5
  Top Layer w8: U1.20 927.48,325.84 973.33,280 1140,280 1223.75,363.75 1223.75,788.75 1267.48,832.48 J3.4
D1/TX: J3.5 U1.21 | length 980.4
  Top Layer w8: U1.21 958.98,321.02 982,298 1130,298 1205.75,373.75 1205.75,820.75 1296.22,911.22 J3.5
D2/SDA: J3.6 U1.19 | length 1176.3
  Top Layer w8: U1.19 895.98,319.02 v1(915,300) ; v1(1203.75,957.1) 1236.61,989.96 J3.6
  Bottom Layer w8: v1(915,300) 930,285 1129.54,285 1203.75,359.2 v1(1203.75,957.1)
D3/SCL: J3.7 U1.18 | length 1329.3
  Top Layer w8: U1.18 864.49,300.51 884.2,280.8 v1(885,280.8) ; v1(1215,1025) 1258.7,1068.7 J3.7
  Bottom Layer w8: v1(885,280.8) 885,280 900,265 1135,265 1230.54,360.54 1230.54,1005.48 1215,1021.02 v1(1215,1025)
D4/CS2: U1.25
D5: U1.31
D6: U1.27
D7: U1.1
D8: U1.28
D9: J3.8 U1.29 | length 793
  Top Layer w8: U1.29 1131.97,621.97 1187.75,677.75 1187.75,884.45 1176.95,895.25 1176.95,1101.95 1222.44,1147.44 J3.8
D10/CS1: J2.8 U1.30 | length 1602.4
  Top Layer w8: v1(485,1155) 485,1159.76 500,1174.76 500,1310 610,1420 610,1480.04 J2.8 ; U1.30 1133.46,653.46 1160.96,680.96 v1(1160.96,710.96)
  Bottom Layer w8: v1(485,1155) 485,1153.97 633.97,1005 1055,1005 1160.96,899.04 v1(1160.96,710.96)
D11: U1.12
D12: U1.26
D13: R10.1 U1.32 | length 292.8
  Top Layer w8: U1.32 1054.92,715 1120,715 1160,755 1160,875 1150,885 R10.1
D14/MISO: J4.1 U1.11 | length 1625.9
  Top Layer w8: v1(360,120) 358.2,118.2 358.2,66.8 388.62,36.38 1181.99,36.38 1259.14,113.53 1346.63,113.53 1390.16,70 J4.1 ; v1(489.42,315.47) 490,316.05 490,395 527.99,432.99 U1.11
  Bottom Layer w8: v1(360,120) 490,250 490,314.89 v1(489.42,315.47)
D15/SCK: J4.3 U1.9 | length 1677.6
  Top Layer w8: v1(430,90) 447.62,72.38 1154.38,72.38 1197.35,115.35 1197.35,138.75 1272.13,213.53 1346.63,213.53 1390.16,170 J4.3 ; v1(465,470) 490.98,495.98 U1.9
  Bottom Layer w8: v1(430,90) 528.2,188.2 528.2,291.1 534.22,297.11 534.22,385.78 465,455 v1(465,470)
D16/MOSI: J4.4 U1.10 | length 1557.6
  Top Layer w8: v1(385,90) 420.62,54.38 1174.54,54.38 1290.16,170 J4.4 ; v1(463.2,370) 463.2,403.2 524.49,464.49 U1.10
  Bottom Layer w8: v1(385,90) 510.2,215.2 510.2,298.55 516.22,304.57 516.22,343.78 493.37,366.63 466.57,366.63 v1(463.2,370)
D+: J2.7 U1.4 | length 1052.8
  Top Layer w8: U1.4 564.43,653.46 520.8,697.1 520.8,1300.8 670,1450 670,1498.78 J2.7
D-: J2.6 U1.3 | length 996
  Top Layer w8: U1.3 558.39,684.96 538.8,704.55 538.8,1293.34 692.52,1447.06 J2.6
FB: IC1.5 R1.1 R2.2 | length 290.1
  Top Layer w8: R1.1 340,940 355,925 355,855 ; IC1.5 280.08,830 280.35,830.28 330.28,830.28 355,855 ; R2.2 370,840 355,855
GND: C1.2 C2.2 C3.2 C4.1 C5.2 C7.2 C8.2 C9.2 C11.2 C12.1 C13.1 C14.1 C15.1 DS1.K DS2.K IC1.6 IC1.7 J2.1 J3.2 J4.6 R2.1 R3.1 R6.1 R7.2 R8.1 R9.2 U1.5 U1.15 U1.23 U1.35 U1.43 | length 7996
  Top Layer w8: IC1.6 279.8,880.2
  Top Layer w10: R7.2 80,815 v1(85,820) ; IC1.7 229.53,837.09 229.53,884.53 235,890 v1(255,890) 270,890 279.8,880.2
  Top Layer w20: R3.1 C4.1 v1(157,912) ; C8.2 C9.2 ; C7.2 C9.2 ; C2.2 C2.2@240,1190 ; v1(290,505) 235,505 C9.2 ; v1(320,1155) 305,1170 260,1170 C2.2@240,1190 ; C5.2@328,633 R6.1 328,559.43 360,527.43 v1(360,505) ; C13.1 242,1028 240,1030 C3.2 C2.2@240,1190 ; DS2.K 403.28,235 415,246.72 415,400 v1(445,430) ; R8.1 400.83,677.83 427.83,677.83 441,691 441,874.28 429.28,886 R2.1 C11.2 430,920 v1(440,930) ; U1.5 691.97,621.97 707.01,637.01 U1.43 707.01,889.99 C12.1 702,975 ; v1(665,970) 666.07,971.07 698.07,971.07 702,975 ; C14.1 v1(790,230) 922,230 C15.1 ; v1(755,315) 755,316.51 769.68,331.2 769.68,369.68 U1.15 770.32,370.32 770.32,400.13 803.18,432.99 U1.23 ; v1(765,1155) 702,1092 702,975 ; U1.35 958.98,908.97 DS1.K ; J2.1 1035,1503.78 1035,1390.15 1060,1365.15 v1(1060,1250) 1060,1248.49 1040,1228.49 DS1.K ; R9.2 1070,845 1040,875 DS1.K ; v1(1313.35,418.35) 1313.35,661.63 1325.06,673.35 1363.35,673.35 J3.2
  Bottom Layer w10: v1(85,820) 155,890 v1@253.49,890
  Bottom Layer w20: v1(157,912) 231.49,912 253.49,890 v1(255,890) v1@256.51,890 ; v1(290,505) v1(360,505) 430,505 432.2,507.2 ; v1(440,930) 400,890 v1@256.51,890 ; v1(445,430) 445,431.51 432.2,444.31 432.2,507.2 ; v1(665,970) 665,725 560,620 560,495 ; v1(1060,1250) 1035,1225 1035,1166.72 1023.28,1155 v1(765,1155) 555,1155 490,1220 385,1220 v1(320,1155) 320,930 305.86,915.86 282.37,915.86 v1@256.51,890 ; J4.6 1300,336.74 ; v1(1313.35,418.35) 1313.35,416.83 1300,403.49 1300,336.74 ; 432.2,507.2 460,535 520,535 560,495 ; 560,495 560,355 600,315 v1(755,315) 790,280 v1(790,230) 830,230 890,170 1075,170 1241.74,336.74 1300,336.74
HWB: R9.1 U1.33 | length 84.7
  Top Layer w8: U1.33 1067.49,747.95 1073.79,754.26 1073.79,757.79 R9.1
ILIM: IC1.9 R7.1 | length 89.8
  Top Layer w8: R7.1 76.2,861 87.24,849.96 IC1.9
NetC5_1: C5.1 IC1.2 J1.1 R4.1 | length 851.2
  Top Layer w8: J1.1 265,275 336.8,346.8 336.8,441.8 389,494 389,621.09 357.17,652.92 357.17,757.37 343.32,771.22 IC1.2 279.8,675 C5.1@279.8,630
NetC6_1: C6.1 IC1.1 L1.2 | length 1258.4
  Top Layer w8: IC1.1 205,745.63 224.45,726.18 224.45,720.55 v1(227.81,717.19) 226.91,716.28 226.91,685.91 C6.1 ; L1.2 355,1230 502.8,1082.2 502.8,677.86 520,660.66 v1(520,660)
  Bottom Layer w8: v1(227.81,717.19) 320,625 485,625 v1(520,660)
NetC6_2: C6.2 IC1.13 | length 899.2
  Top Layer w8: IC1.13 129.28,770.3 113.19,770.3 30,687.11 30,410.2 84.2,356 155.8,356 180,380.2 C6.2
NetC10_2: C10.2 R8.2 | length 34
  Top Layer w8: R8.2 C10.2
NetC12_2: C12.2 U1.42 | length 88
  Top Layer w8: U1.42 738.5,885.5 C12.2
NetC13_2: C13.2 U1.6 | length 631.4
  Top Layer w8: C13.2 374.55,982 383.37,990.83 457.46,990.83 484.8,963.49 484.8,657.31 551.63,590.47 U1.6
NetC14_2: C14.2 U1.16 Y1.2 | length 340.9
  Top Layer w8: Y1.2 667,113 C14.2 717,280 757.89,280 801.5,323.6 U1.16
NetC15_2: C15.2 U1.17 Y1.1 | length 377.5
  Top Layer w8: U1.17 832.99,294.11 873.11,254 966.31,254 973,247.31 C15.2 973,121.96 Y1.1
NetDS1_A: DS1.A R10.2 | length 61.1
  Top Layer w8: DS1.A 1115,985 R10.2
NetDS2_A: DS2.A R12.2 | length 62.1
  Top Layer w8: R12.2 365,310 DS2.A
NetIC1_11: IC1.11 R3.2 R5.2 | length 357.5
  Top Layer w8: R3.2 82,888 101.12,868.88 151.74,868.88 159.95,860.68 159.95,819.56 158.51,818.12 158.51,811.49 160,810 160,801.57 ; IC1.11 141.18,810.59 141.95,809.83 151.74,809.83 160,801.57 ; R5.2 146,741.41 160,755.41 160,801.57
OUT: C1.1 C2.1 C3.1 C4.2 IC1.8 R1.2 | length 439.6
  Top Layer w8: C2.1 C3.1 C1.1 130,1000 156,974 169,974 C4.2 ; IC1.8 181.38,898.48 203,920.11 C4.2 ; R1.2 C4.2
RST: J4.5 R11.1 U1.13 | length 1586.2
  Top Layer w8: v1(555,280) 558.37,276.63 578.37,276.63 587,268 R11.1 648.42,291.42 649.76,291.42 707.01,348.67 U1.13 ; v1(1155,140) 1155,235 1233.53,313.53 1346.63,313.53 1390.16,270 J4.5
  Bottom Layer w8: v1(555,280) 555,185 500,130 500,90 515,75 1140,75 1155,90 v1(1155,140)
RXLED: R12.1 U1.8 | length 304
  Top Layer w8: R12.1 369.14,415.14 369.14,429.14 467.48,527.48 U1.8
SS: C11.1 IC1.3 | length 697.6
  Top Layer w8: IC1.3 349.09,790.91 375.17,764.83 375.17,660.37 400.55,635 445,635 466.8,656.8 466.8,956.03 450,972.83 406.83,972.83 C11.1
TXLED: U1.22
VBAT: J3.1
VDD: J1.3 R4.2 R6.2 | length 1659.9
  Top Layer w20: J1.3 159.41,78.15 95,142.56 95,286.12 133.38,324.5 274.5,324.5 v1(310,360) 310,361.51 312.8,364.31 312.8,451.74 325,463.94 325,520 282.83,562.17 282.83,589.17 R6.2 ; v1(320,740) 330,730 R4.2
  Bottom Layer w20: v1(310,360) 308.93,358.93 274.91,358.93 273.77,357.8 257.2,357.8 240,375 56.72,375 45,386.72 45,580.76 225.96,761.72 242.53,761.72 264.24,740 v1(320,740)
VIN: C7.1 C8.1 C9.1 IC1.12 L1.1 R5.1 | length 1221.3
  Top Layer w8: 83.84,790.91 IC1.12
  Top Layer w10: v1(35,750) 75.91,790.91 83.84,790.91
  Top Layer w20: v1(53.3,993.32) 53.3,1221.58 125,1293.28 L1.1 ; v1(60,665) 61.07,663.93 71.07,663.93 90,645 C7.1@100,645 ; R5.1 C7.1@100,645 ; C8.1 C9.1 C7.1 100,635 C7.1@100,645
  Bottom Layer w20: v1(53.3,993.32) 53.3,991.81 45,983.51 45,761.51 35,751.51 35,691.51 60,666.51 v1(60,665)
VOUT: J4.2 R11.2 U1.2 U1.7 U1.14 U1.24 U1.34 U1.44 | length 3503.3
  Top Layer w8: v1(520,580) 541.02,558.98 U1.7 751.02,558.98 800,510 800,485 738.5,423.5 738.5,408.5 ; U1.2 633.85,716.46 675.51,758.12 U1.44 675.51,879.49 v1(620,935) ; U1.34 990.47,754.98 923.98,688.48 923.98,464.49 ; U1.24 923.98,464.49 ; J4.2 1241.07,70 1189.45,18.38 366.62,18.38 330,55 330,130 361.5,161.5 616.5,161.5 633,178 R11.2 639.83,236.83 639.83,244.28 735.89,340.34 735.89,367.39 U1.14 738.5,408.5 ; 738.5,408.5 794.49,464.49 923.98,464.49
  Bottom Layer w8: v1(520,580) 520,622.11 565,667.11 565,880 v1(620,935)
VUSB: J3.3
pads on no net: IC1.10 J1.2

## Polygon pours and split planes (outlines as drawn)
GND on Top Layer "GND_L01_P000" (solid, pour order 0): 0,0 1445,0 1455,10 1455,1375 1205,1625 435,1625 365,1555 65,1555 20,1510 20,965 0,945
GND on Bottom Layer "GND_L02_P001" (solid, pour order 1): 0,0 1445,0 1455,10 1455,1375 1205,1625 435,1625 365,1555 65,1555 20,1510 20,965 0,945

## Silkscreen, mask and mechanical layers (free items; w line width, h text height)
Mechanical 1:
  lines w30: 0,0 20,0 1445,0 1455,10 1455,1375 1205,1625 435,1625 365,1555 65,1555 20,1510 20,965 0,945 0,0

## Text inside footprints (layer, text, board x,y; h text height)
DS1: Top Overlay "K" at 967.72,980.15 h22; Top Overlay "A" at 1153.25,983.11 h20
DS2: Top Overlay "K" at 379.85,162.72 h22 r90; Top Overlay "A" at 376.89,348.25 h20 r90